# Altium PCB PCB1.PcbDoc
Units mm, origin at the board's own origin, x right, y up, seen from the top; angles counter-clockwise.
Board outline 106.01 x 67.51 mm, 2 copper layers (Top Layer, Bottom Layer); 24 components, 18 nets, 79 pads, 0 vias.
Unrouted connection lines stored in the file: 3.
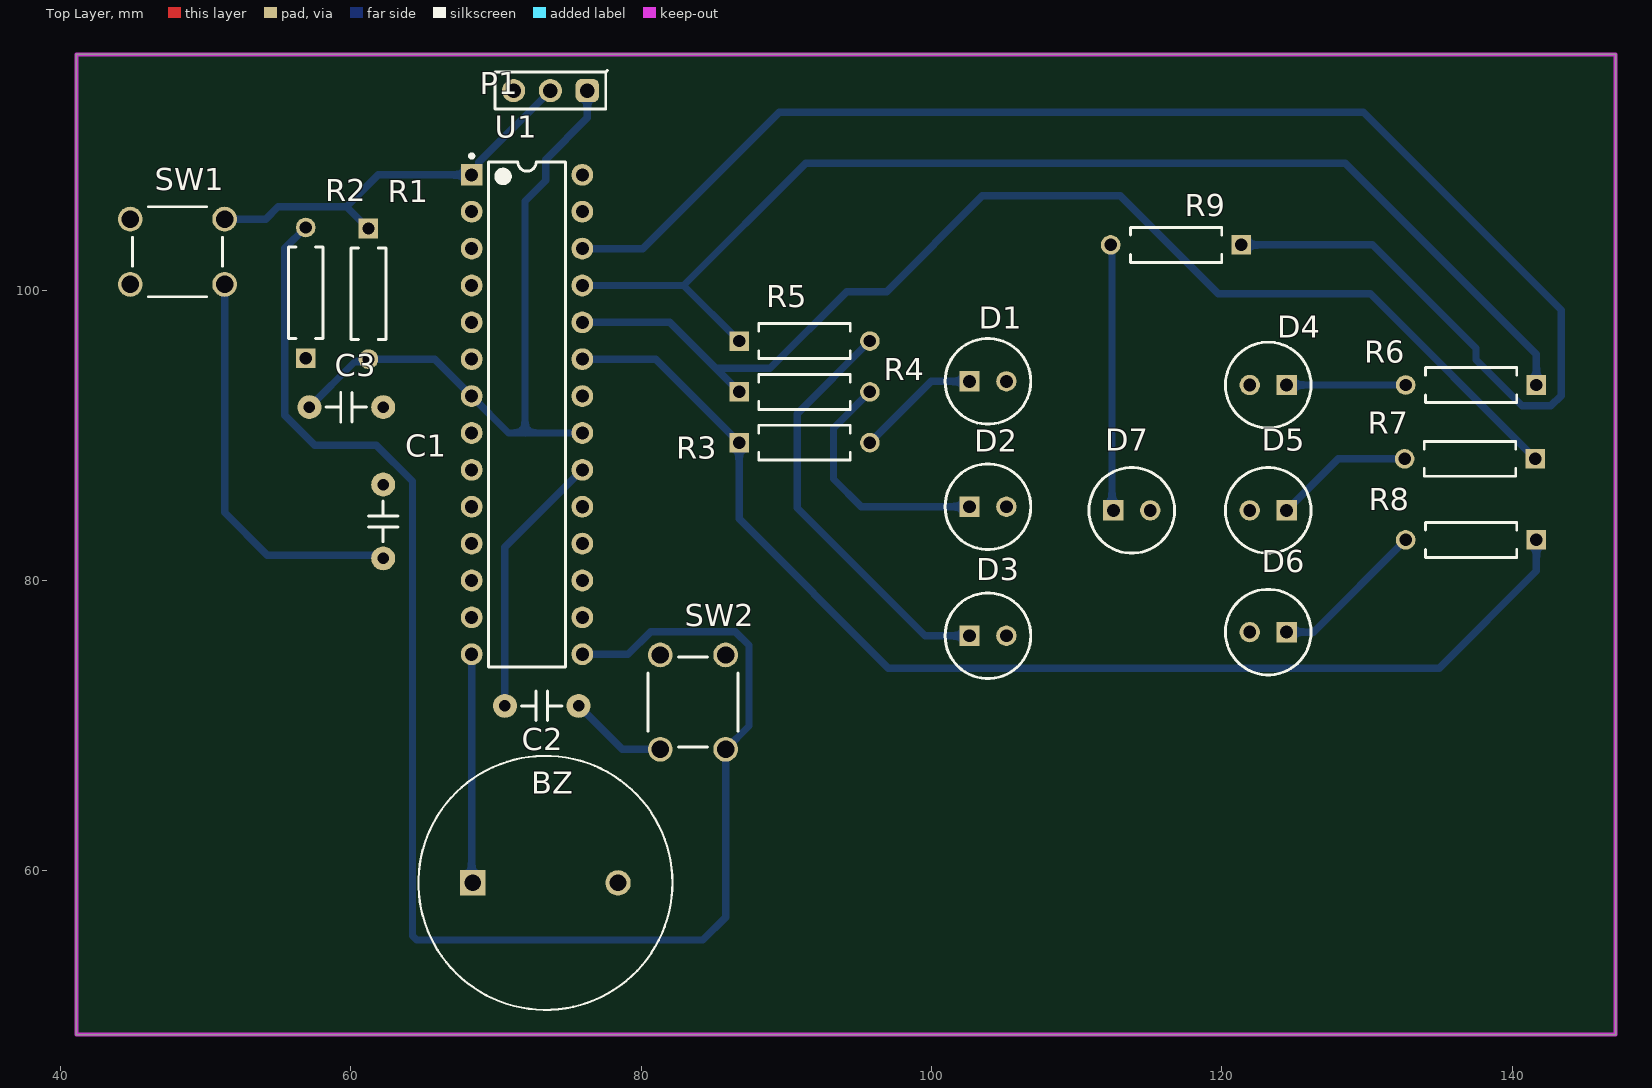
[diagram p0: Top Layer view]
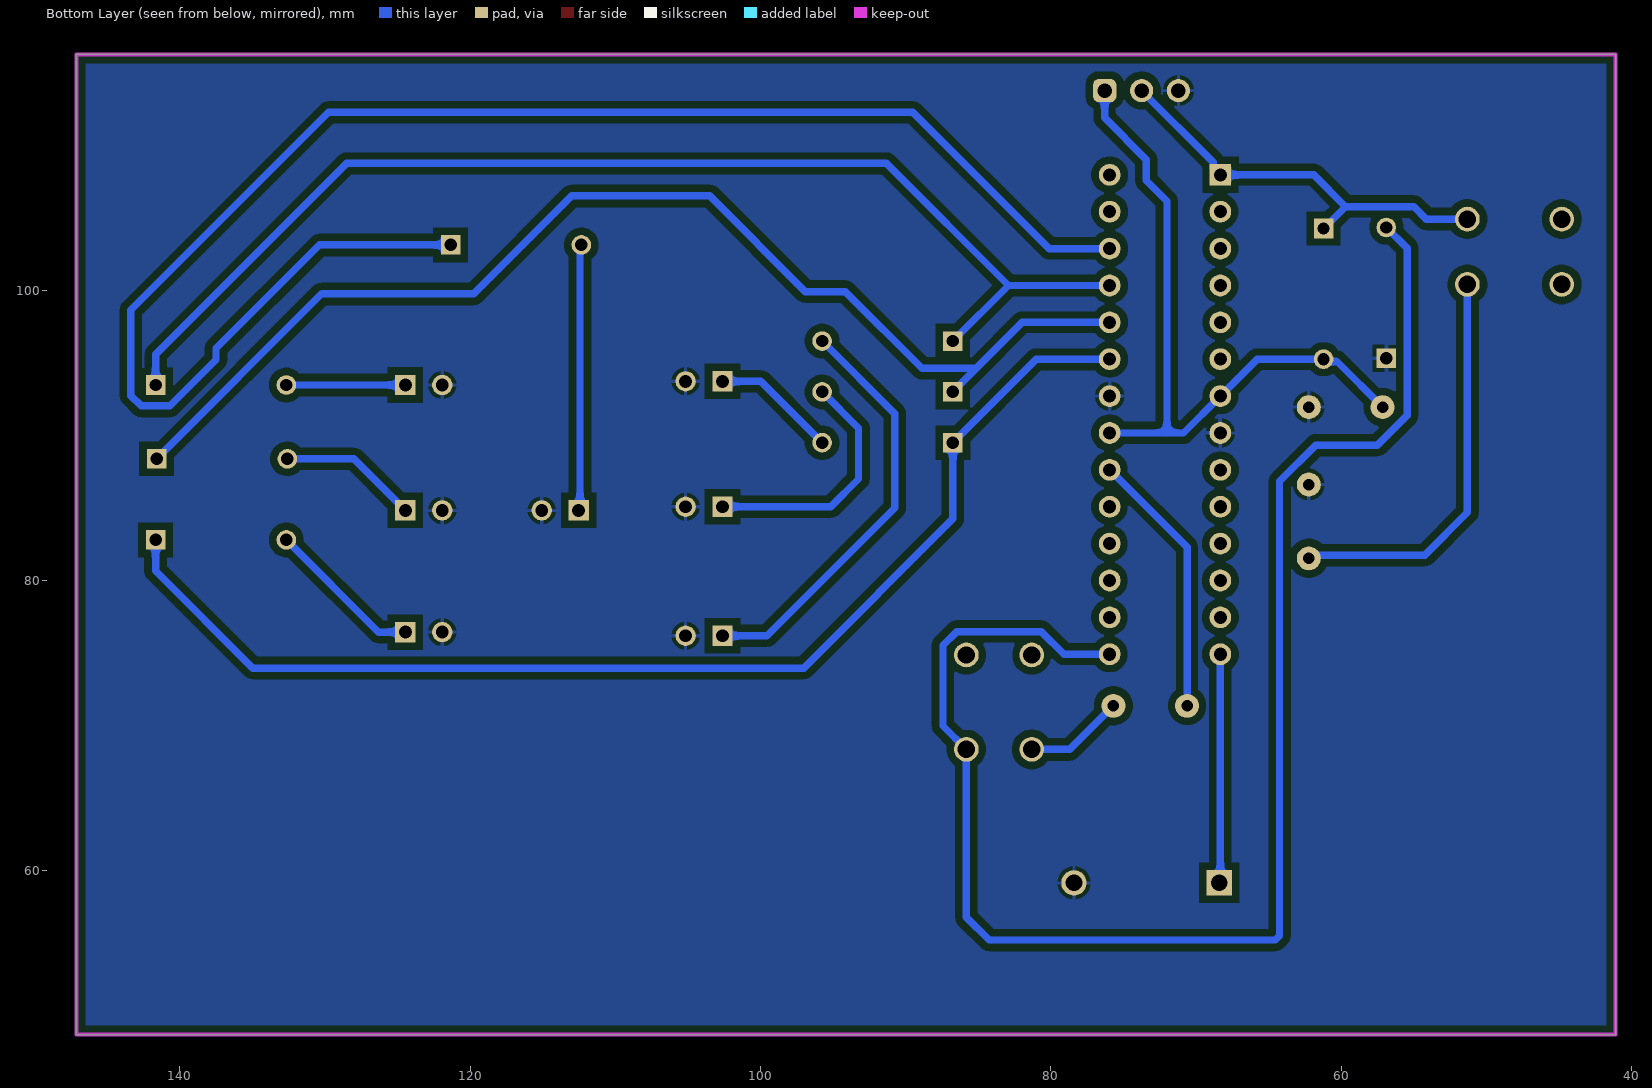
[diagram p1: Bottom Layer view, seen from below]
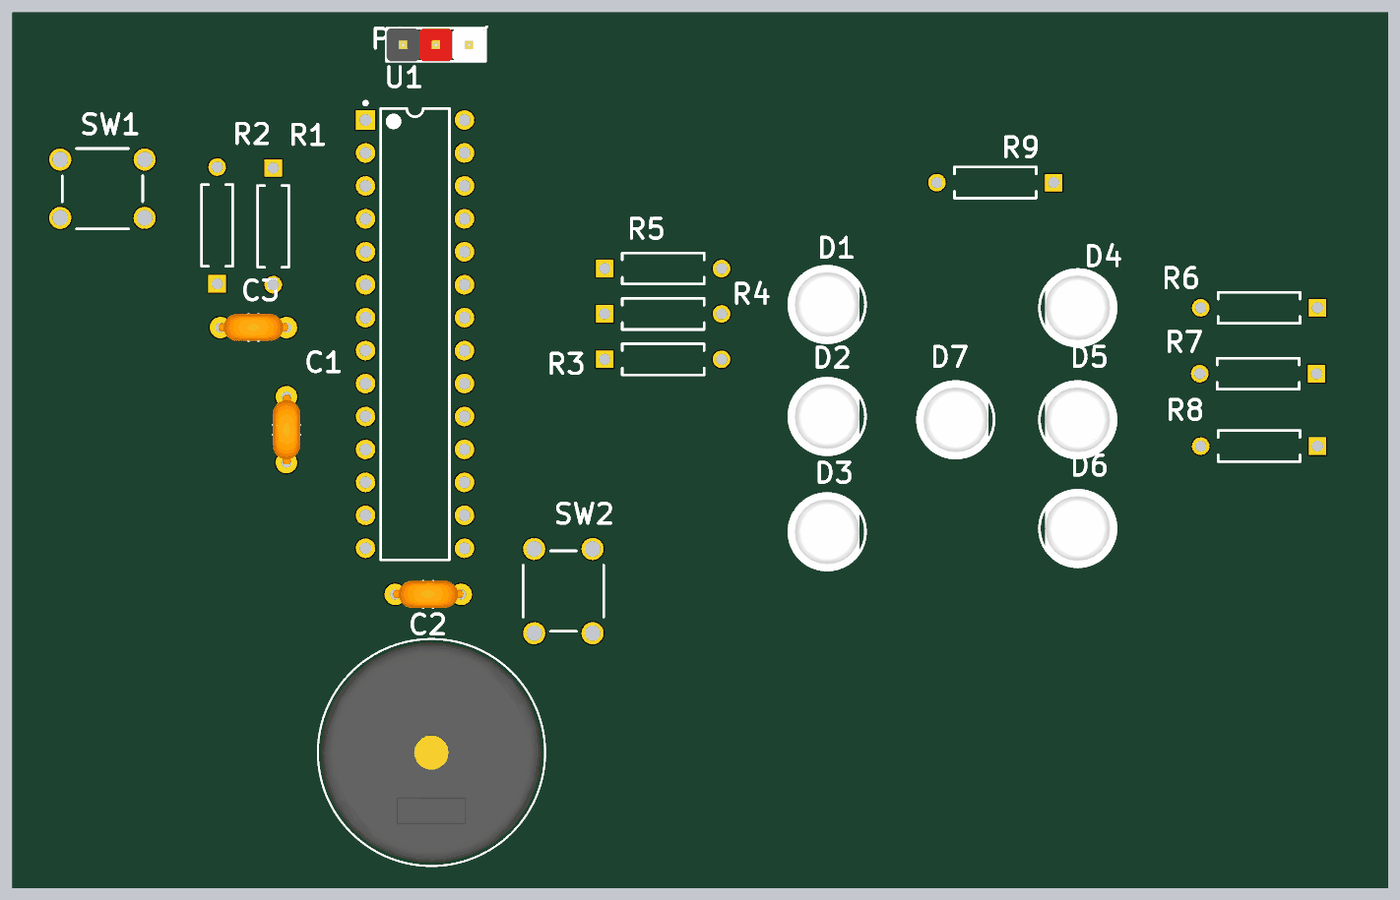
[diagram p2: 3D render of the assembled board from above, using the file's embedded part models]

## Layer stack, top to bottom
Top Solder: solder mask 0.0102, Solder Resist, Dk 3.5
Top Layer: signal copper 0.0356
Dielectric 1: dielectric 0.32, FR-4, Dk 4.8
Bottom Layer: signal copper 0.0356
Bottom Solder: solder mask 0.0102, Solder Resist, Dk 3.5

## Board outline
41.104,48.735 41.104,116.241 147.112,116.241 147.112,48.735

## Design rules (kind name [scope] priority, off if disabled: settings)
Clearance [All] p1: gap=0.508 ignorepadtopadclearanceinfootprint=FALSE
PolygonConnect [All] p1: connectstyle=Relief reliefconductorwidth=0.254 reliefentries=4 polygonreliefangle="90 Angle" airgapwidth=0.254
RoutingVias [All] p1: holewidth=0.711 width=1.27 viastyle="Through Hole" minholewidth=0.711 minwidth=1.27 maxholewidth=0.711 maxwidth=1.27
SolderMaskExpansion [All] p1: expansion=0.102 istentingtop=FALSE
SupplyNets "Schematic Supply Nets_1" [InNet('+5')] p1: voltage=0.000
SupplyNets "Schematic Supply Nets" [InNet('GND')] p2: voltage=0.000
Width [All] p1: maxlimit=1.016 minlimit=0.508 preferedwidth=0.508
30 further rules are at their usual default settings.

## Components (designator, comment, footprint, x,y, rotation, side; value= is the part's Value field where it differs from the comment)
BZ "PKM17EPPH4002-B0" FP-PKM17EPPH4002-B0-MFG 73.406,59.182 r0 top
C1 "100nF" "CAP Ceramic/W200" 62.23,81.534 r90 top
C2 "100nF" "CAP Ceramic/W200" 75.692,71.374 r180 top
C3 "100nF" "CAP Ceramic/W200" 62.23,91.948 r180 top
D1 "WP7113SRD/D" KING-WP7113SRDD_V 103.886,93.726 r0 top
D2 "WP7113SRD/D" KING-WP7113SRDD_V 103.886,85.09 r0 top
D3 "WP7113SRD/D" KING-WP7113SRDD_V 103.886,76.2 r0 top
D4 "WP7113SRD/D" KING-WP7113SRDD_V 123.19,93.472 r180 top
D5 "WP7113SRD/D" KING-WP7113SRDD_V 123.19,84.836 r180 top
D6 "WP7113SRD/D" KING-WP7113SRDD_V 123.19,76.454 r180 top
D7 "WP7113SRD/D" KING-WP7113SRDD_V 113.792,84.836 r0 top
P1 "Header 3" HDR/Header/3/c1 73.75,113.75 r180 top
R1 "MFR-25FBF52-10K" RESA60-630X240 61.214,99.75 r270 top value=10k
R2 "MFR-25FBF52-10K" RESA60-630X240 56.896,99.822 r90 top value=10k
R3 "MFR-25FBF52-1K" RESA60-630X240 91.25,89.5 r0 top value=1k
R4 "MFR-25FBF52-1K" RESA60-630X240 91.25,93 r0 top value=1k
R5 "MFR-25FBF52-1K" RESA60-630X240 91.25,96.5 r0 top value=1k
R6 "MFR-25FBF52-1K" RESA60-630X240 137.16,93.472 r180 top value=1k
R7 "MFR-25FBF52-1K" RESA60-630X240 137.088,88.392 r180 top value=1k
R8 "MFR-25FBF52-1K" RESA60-630X240 137.16,82.804 r180 top value=1k
R9 "MFR-25FBF52-1K" RESA60-630X240 116.84,103.124 r180 top value=1k
SW1 "TS-1109" BEST-TS-1109_V 48.058,102.652 r180 top
SW2 "TS-1109" BEST-TS-1109_V 83.566,71.628 r90 top
U1 "ATMEGA328P-PU" ATML-28P3 72.136,91.44 r0 top

## Footprints (in the part's own frame and the unit in brackets; to place one, negate y for a bottom-side part, rotate by r counter-clockwise, add the part's x,y. Pads: shape width x height; smd on the part's side, far side on the other; paste and mask are expansions set on the pad)
ATML-28P3 [mm] "DIP, 28-Leads, Body 34.8x7.2mm, Pitch 2.54mm"
  rect 1.5x1.5 hole 0.9: 1(-3.81,16.51)
  round 1.5 hole 0.9: 2(-3.81,13.97) 3(-3.81,11.43) 4(-3.81,8.89) 5(-3.81,6.35) 6(-3.81,3.81) 7(-3.81,1.27) 8(-3.81,-1.27) 9(-3.81,-3.81) 10(-3.81,-6.35) 11(-3.81,-8.89) 12(-3.81,-11.43) 13(-3.81,-13.97) 14(-3.81,-16.51) 15(3.81,-16.51) 16(3.81,-13.97) 17(3.81,-11.43) 18(3.81,-8.89) 19(3.81,-6.35) 20(3.81,-3.81) 21(3.81,-1.27) 22(3.81,1.27) 23(3.81,3.81) 24(3.81,6.35) 25(3.81,8.89) 26(3.81,11.43) 27(3.81,13.97) 28(3.81,16.51)
  silkscreen extent -3.93,-17.4 2.65,17.93, body extent -3.95,-17.4 3.95,17.4, height 4.58
BEST-TS-1109_V [mm] "THD, 4-Leads, Body 6.2x6.2mm"
  round 1.7 hole 1.2: 1(-3.25,2.25) 2(3.25,2.25) 3(-3.25,-2.25) 4(3.25,-2.25)
  silkscreen extent -3.1,-3.1 3.1,3.1
"CAP Ceramic/W200" [mil]
  round 65 hole 31: 1(0,0) 2(200,0)
  silkscreen extent 45,-40 155,40, body extent -6,-42 206,41, height 181
FP-PKM17EPPH4002-B0-MFG [mm]
  rect 1.75x1.75 hole 1.15 paste-2539.97 mask+0: 1(-5,0)
  round 1.75 hole 1.15 paste-2539.97 mask+0: 2(5,0)
  silkscreen extent -8.75,-8.75 8.75,8.75, body extent -8.85,-8.85 8.85,8.85, height 0.25
HDR/Header/3/c1 [mm]
  rrect50% 1.6x1.6 hole 1: 1(-2.54,0)
  round 1.6 hole 1: 2(0,0) 3(2.54,0)
  silkscreen extent -3.94,-1.4 3.81,1.27, body extent -3.81,-1.27 3.81,1.27, height 8.89
KING-WP7113SRDD_V [mm] "THD, 2-Leads, Dia 5.9mm, Body Length 8.6mm"
  rect 1.4x1.4 hole 0.889: 1(-1.27,0)
  round 1.4 hole 0.889: 2(1.27,0)
  silkscreen extent -2.95,-2.95 2.95,2.95, body extent -2.95,-2.95 2.5,2.95, height 15.5
RESA60-630X240 [mm] "Axial Resistor, 2-Leads, Dia 2.4mm, Body Length 6.3mm"
  rect 1.35x1.35 hole 0.85: 1(-4.5,0)
  round 1.35 hole 0.85: 2(4.5,0)
  silkscreen extent -3.15,-1.2 3.15,1.2, body extent -4.77,-1.19 4.77,1.2, height 2.4

## Part data
BZ: library part CMP-06202-000042-1, "AUDIO PIEZO TRANSDUCER 25V TH", Frequency=4kHz, Max Operating Temperature=70°C, Min Operating Temperature=-20°C, Package Quantity=1200, Voltage Rating=1.5V, Diameter=17mm, Height=8.7mm, Mount="Through Hole", Packaging=Bulk, Self Resonant Frequency=4kHz, Series=PK, Termination=Pin, Washable=No
C1 C2 C3: library part "Capacitor NP", "Capacitor non-pol"
D1 D2 D3 D4 D5 D6 D7: library part CMP-007-00033-2, "The Super Bright Red Source Color Device, 1.85 V, -40 to 85 degC, 2-Pin THD, RoHS, Tape and Reel", Case/Package=Radial, Colour=Red, Forward Voltage=1.85V, Manufacturer=Kingbright, Package Description="2-Pin Through Hole Device, Dia 5.9 mm, Body Length 8.6 mm", Package Quantity=500, Package Reference=WP7113SRDD, Datasheet URL=http://www.kingbrightusa.com/images/catalog/SPEC/WP7113SRD-D.pdf, Datasheet Version="Rev. 6A, 07/2016", Illumination Colour=Red, Lens Style=Diffused, Luminous Intensity=300mcd, Mounting Technology=TH, Nominal Vf=1.85V, Packaging=Bulk, RoHS Compliant=True, Viewing Angle=30degrees
P1: "Header, 3-Pin"
R1 R2: library part CMP-009-00047-4, "Axial Resistor, 10 KOhm, +/- 1%, 0.25 W, -55 to 155 degC, 2-Pin THD, RoHS, Bulk", Case/Package=Axial, Manufacturer=Yageo, Max Operating Temperature=155°C, Min Operating Temperature=-55°C, Package Description="2-Pin Axial Lead, Dia 2.4 mm, Body Length 6.3 mm", Package Quantity=200, Package Reference=MFR-25, Power=250mW, Tolerance=1%, Voltage Rating=250V, Datasheet URL=http://www.yageo.com/documents/recent/Yageo%20LR_MFR_2013.pdf, Datasheet Version=Apr-13, Manufacturer URL=http://www.yageo.com/, Mounting Technology=TH, Packaging=Bulk, RoHS Compliant=True
R3 R4 R5 R6 R7 R8 R9: library part CMP-009-00048-4, "Axial Resistor, 1 KOhm, +/- 1%, 250 mW, -55 to 155 degC, 2-Pin THD, RoHS, Bulk", Case/Package=Axial, Manufacturer=Yageo, Max Operating Temperature=155°C, Min Operating Temperature=-55°C, Package Description="2-Pin Axial Lead, Dia 2.4 mm, Body Length 6.3 mm", Package Quantity=200, Package Reference=MFR-25, Power=250mW, Tolerance=1%, Voltage Rating=250V, Composition=CarbonFilm, Datasheet URL=http://www.yageo.com/documents/recent/Yageo%20LR_MFR_2013.pdf, Datasheet Version=Apr-13, Manufacturer URL=http://www.yageo.com/, Mounting Technology=TH, Packaging=Bulk, RoHS Compliant=True
SW1 SW2: library part CMP-011-00002-2, "Tactile Switch, SPST, 12 V, 50 mA, -20 to 80 degC, 4-Pin THD", Manufacturer="Shenzhen Best", Package Description="4-Pin Through Hole Device, Body 6.2 x 6.2 mm", Case/Package=TS-1109, Datasheet URL=http://datasheet.octopart.com/TS-1109-Best-Inc.-datasheet-30458100.pdf, Datasheet Version=Dec-12, Manufacturer URL=www.best-dz.com/, Mounting Technology=TH, Package Reference=TS-1109, RoHS Compliant=Unknown
U1: library part CMP-020-00004-3, "8-Bit Microcontroller with 32 KBytes In-System Programmable Flash, 23 I/Os, -40 to 85 degC, 28-Pin PDIP (28P3), RoHS, Tube", Case/Package=DIP, Manufacturer=Atmel, Max Clock Frequency=20MHz, Max Operating Temperature=85°C, Max Supply Voltage=5.5V, Min Operating Temperature=-40°C, Min Supply Voltage=1.8V, Package Description="28-Pin Plastic Dual Inline Package, Body 34.671 x 7.3025 mm, Pitch 2.54 mm", Package Quantity=14, Package Reference=28P3, Package Version="Rev. B, 09/2001", Datasheet URL=http://www.atmel.com/images/Atmel-8271-8-bit-AVR-Microcontroller-ATmega48A-48PA-88A-88PA-168A-168PA-328-328P_datasheet_Complete.pdf, Datasheet Version="Rev. 8271J, 11/2015", Density=32KB, Ethernet Channels=0, I/Os=23, Interface=USART, Manufacturer URL=http://www.atmel.com/, Mounting Technology=TH, Package URL=http://www.atmel.com/images/Atmel-8271-8-bit-AVR-Microcontroller-ATmega48A-48PA-88A-88PA-168A-168PA-328-328P_datasheet_Complete.pdf, Packaging=Rail/Tube, Pins=28, RAM Size=2KB, RoHS Compliant=True

## Nets (pads, with @x,y where several pads share a name; then routed paths per layer and width w, separated by ;. In a path a pad name is that pad's centre, name@x,y a point inside that pad or via, vN(x,y) a via of type N, cw(c..) or ccw(c..) an arc to the next point about the centre after c; other vN are vias at no path point)
+5: C2.2 C3.2 P1.1 R1.2 U1.7 U1.20 U1.21 | length 66.1
  Bottom Layer w0.508: C3.2 60.291,95.089 61.053,95.089 R1.2 65.786,95.25 U1.7 70.866,90.17 72,90.17 ; C2.2 70.612,82.296 U1.20 ; U1.21 72,90.17 ; P1.1 76.29,111.869 73.418,108.997 73.418,107.56 72,106.142 72,90.17
BUZZER: BZ.1 U1.14 | length 15.8
  Bottom Layer w0.508: U1.14 68.326,59.262 BZ.1
GND: BZ.2 C1.2 C3.1 D1.2 D2.2 D3.2 D4.2 D5.2 D6.2 D7.2 P1.3 R2.1 U1.8 U1.22
Group_1: R3.1 R8.1 U1.23 | length 82.5
  Bottom Layer w0.508: U1.23 81,95.25 R3.1 86.75,84.25 97.024,73.976 134.976,73.976 141.66,80.66 R8.1
Group_2: R4.1 R7.1 U1.24 | length 81.7
  Bottom Layer w0.508: U1.24 81.96,97.79 85.125,94.625 ; R4.1 85.125,94.625 ; R7.1 130.23,99.75 119.75,99.75 113,106.5 103.5,106.5 96.905,99.905 94.155,99.905 88.875,94.625 85.125,94.625
Group_3: R5.1 R6.1 U1.25 | length 82.2
  Bottom Layer w0.508: U1.25 82.92,100.33 ; R5.1 82.92,100.33 ; R6.1 141.66,95.59 128.5,108.75 91.34,108.75 82.92,100.33
Group_4: R9.1 U1.26 | length 110.2
  Bottom Layer w0.508: U1.26 80.12,102.87 89.5,112.25 129.75,112.25 143.361,98.639 143.361,92.745 142.651,92.035 140.669,92.035 137.5,95.204 137.5,96 130.376,103.124 R9.1
NetC1_1: C1.1 SW1.1 | length 27.9
  Bottom Layer w0.508: SW1.1 51.308,84.692 54.25,81.75 62.014,81.75 C1.1
NetC2_1: C2.1 SW2.1 | length 6.9
  Bottom Layer w0.508: C2.1 78.688,68.378 SW2.1
NetD1_1: D1.1 R3.2 | length 8.6
  Bottom Layer w0.508: R3.2 99.976,93.726 D1.1
NetD2_1: D2.1 R4.2 | length 17.2
  Bottom Layer w0.508: R4.2 93.25,90.5 93.25,87 95.16,85.09 D2.1
NetD3_1: D3.1 R5.2 | length 29.1
  Bottom Layer w0.508: R5.2 90.75,91.5 90.75,85 99.55,76.2 D3.1
NetD4_1: D4.1 R6.2 | length 8.2
  Bottom Layer w0.508: D4.1 R6.2
NetD5_1: D5.1 R7.2 | length 9.6
  Bottom Layer w0.508: D5.1 128.016,88.392 R7.2
NetD6_1: D6.1 R8.2 | length 10.8
  Bottom Layer w0.508: D6.1 126.31,76.454 R8.2
NetD7_1: D7.1 R9.2 | length 18.4
  Bottom Layer w0.508: R9.2 112.431,103.033 112.431,84.927 D7.1
RND_BTN: R2.2 SW2.3 U1.15 | length 109.7
  Bottom Layer w0.508: R2.2 55.459,102.885 55.459,91.394 57.52,89.333 61.756,89.333 64.25,86.839 64.25,55.548 64.548,55.25 84.25,55.25 85.816,56.816 SW2.3 87.428,69.99 87.428,75.546 86.484,76.49 80.648,76.49 79.088,74.93 U1.15
RST_BTN: P1.2 R1.1 SW1.3 U1.1 | length 28.5
  Bottom Layer w0.508: SW1.3 54.132,104.902 54.989,105.759 59.705,105.759 ; R1.1 59.705,105.759 ; P1.2 68.822,108.822 68.822,108.446 U1.1 61.896,107.95 59.705,105.759
pads on no net: SW1.2 SW1.4 SW2.2 SW2.4 U1.2 U1.3 U1.4 U1.5 U1.6 U1.9 U1.10 U1.11 U1.12 U1.13 U1.16 U1.17 U1.18 U1.19 U1.27 U1.28

## Polygon pours and split planes (outlines as drawn)
GND on Bottom Layer "GND_L02_P000" (solid, pour order 0): 41.104,116.241 147.112,116.241 147.112,48.735 41.104,48.735

## Keep-outs
Keep-Out Layer:
  the board outline again, w0.254